# Altium PCB PCB.pcbdoc
Units mm, origin at the board's own origin, x right, y up, seen from the top; angles counter-clockwise.
Board outline 127.4 x 116.9 mm, 2 copper layers (Top Layer, Bottom Layer); 58 components, 73 nets, 184 pads, 58 vias.
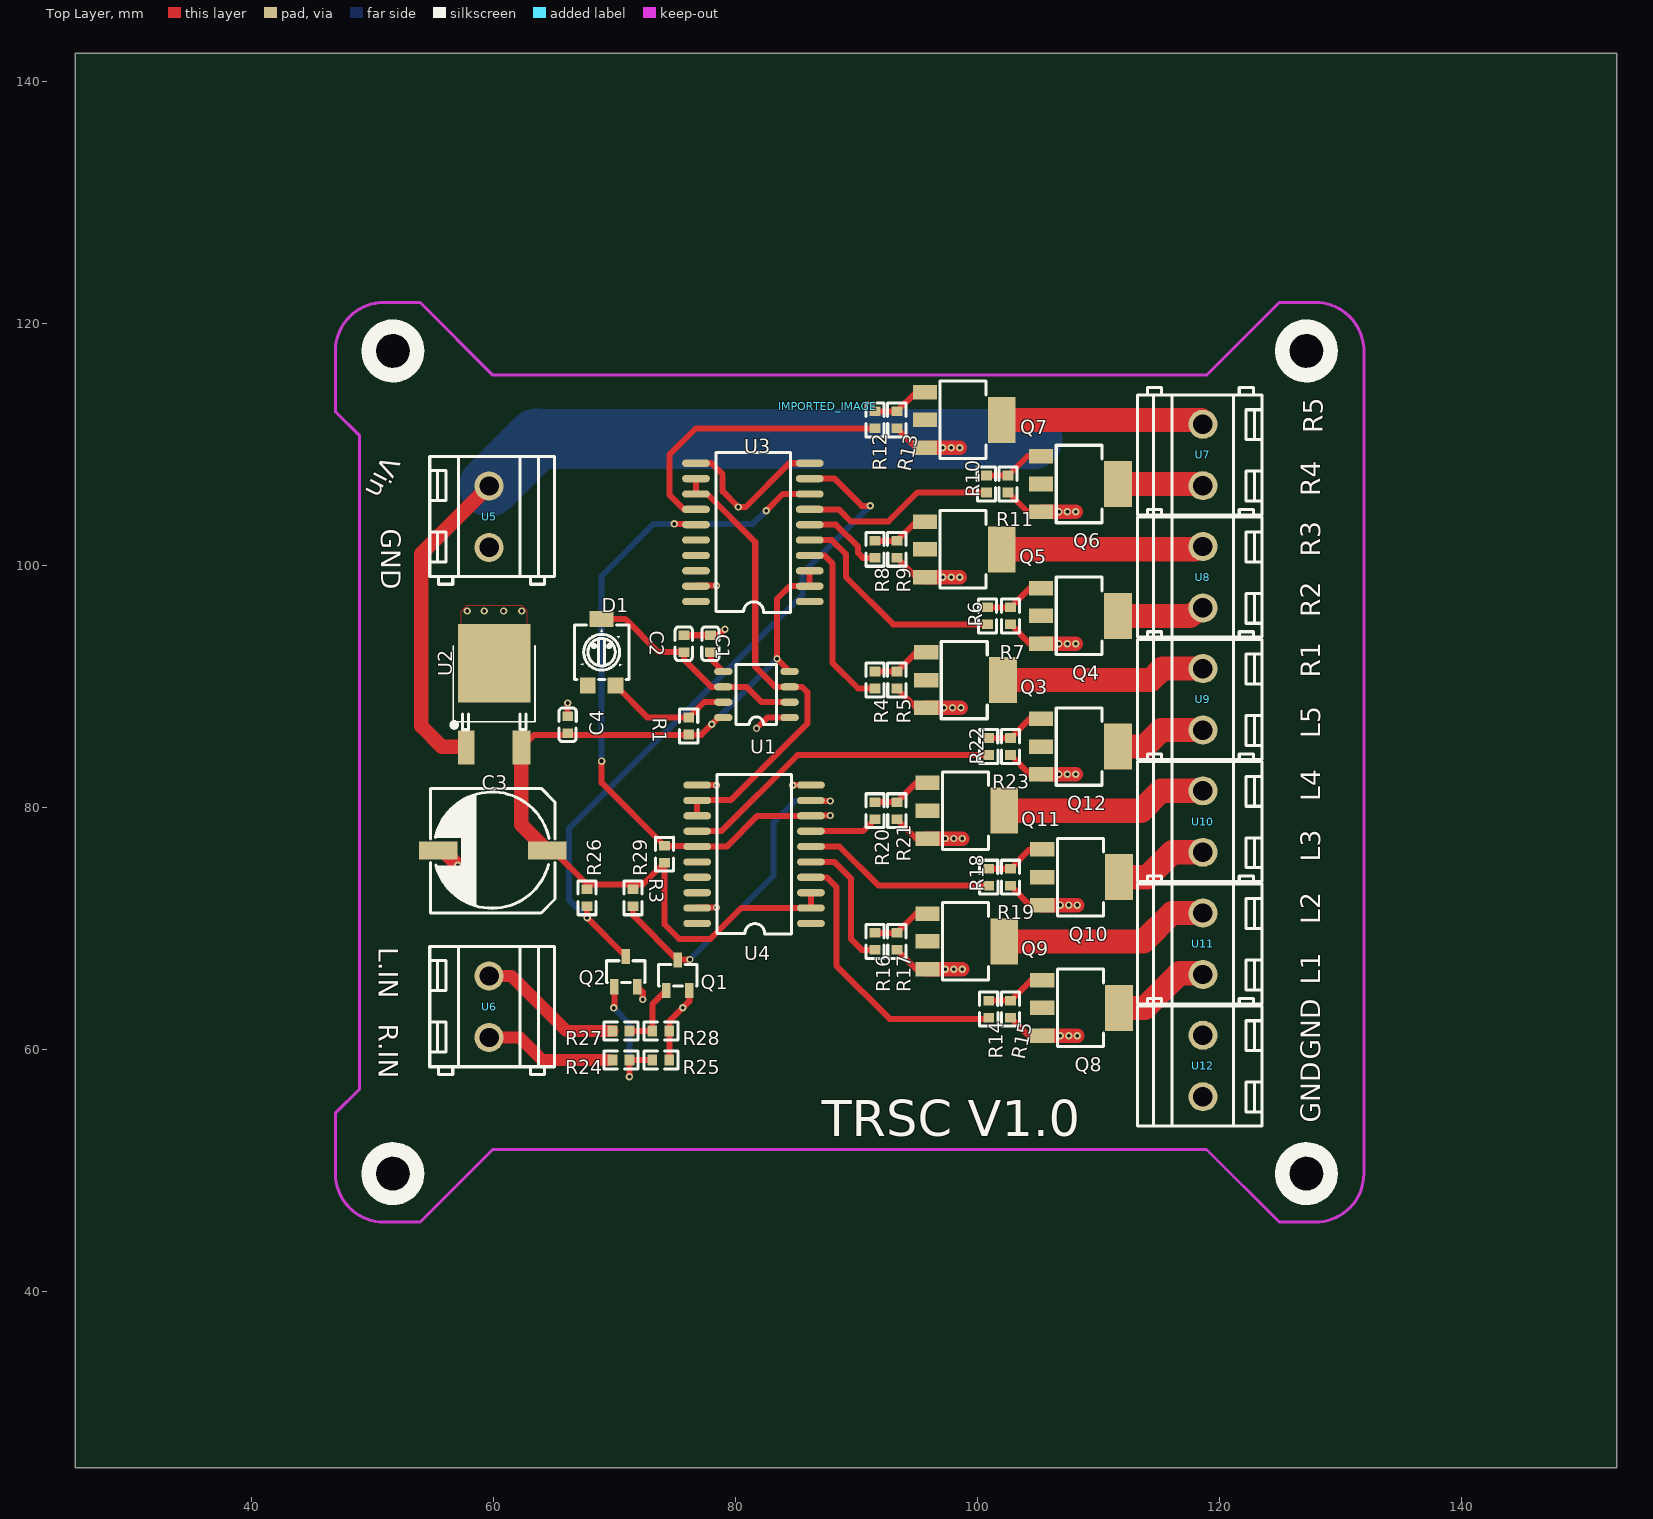
[diagram p0: Top Layer view]
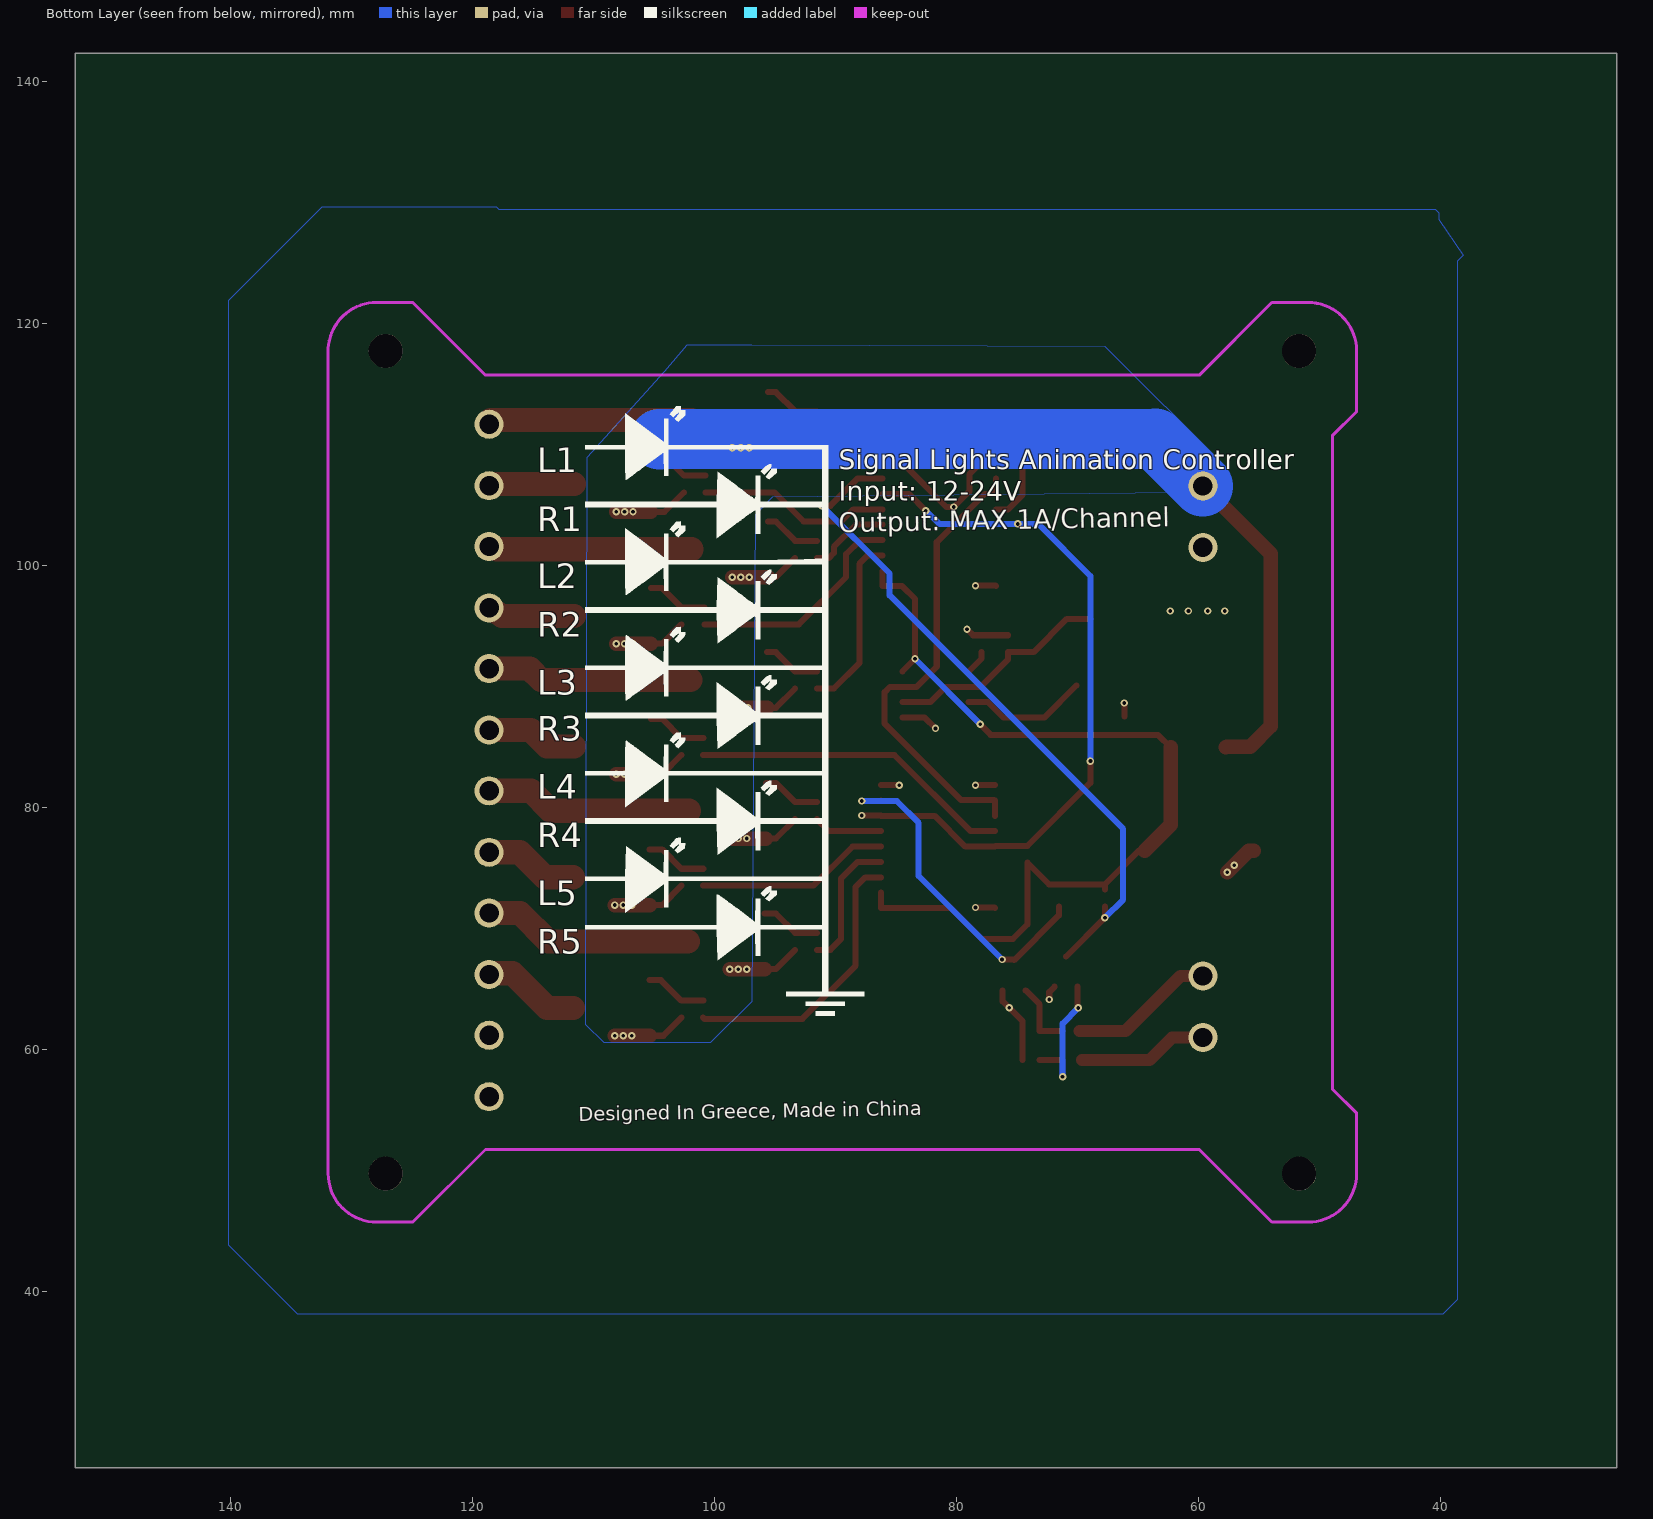
[diagram p1: Bottom Layer view, seen from below]

## Layer stack, top to bottom
Top Layer: signal copper (thickness not stored)
Dielectric: dielectric 0.32, FR-4, Dk 4.8
Bottom Layer: signal copper (thickness not stored)

## Board outline
152.8,25.4 25.4,25.4 25.4,142.3 152.8,142.3

## Components (designator, comment, footprint, x,y, rotation, side; value= is the part's Value field where it differs from the comment)
C1 "10nF" C0603 77.9,93.5 r90 top
C2 "10uF" C0603 75.7,93.5 r90 top
C3 "220uF" CAP-SMD_BD10.0-L10.3-W10.3-RD 59.9,76.4 r0 top
C4 "10uF" C0603 66.1,86.8 r90 top
D1 "3314G-1-103E" RES-ADJ-SMD_3314G-1-103E 68.9,92.8 r0 top
IMPORTED_IMAGE "IMPORTED_IMAGE" IMPORTED_IMAGE 87.603,113.133 r0 top
Q1 "BS870-7-F" SOT-23-3_L3.0-W1.7-P0.95-LS2.9-BR 75.2,66.1 r270 top
Q2 "BS870-7-F" SOT-23-3_L3.0-W1.7-P0.95-LS2.9-BR 70.9,66.4 r270 top
Q3 "ZXMP6A17GTA" SOT-223-4_L6.5-W3.5-P2.30-LS7.0-BR 98.9,90.5 r180 top
Q4 "ZXMP6A17GTA" SOT-223-4_L6.5-W3.5-P2.30-LS7.0-BR 108.4,95.801 r180 top
Q5 "ZXMP6A17GTA" SOT-223-4_L6.5-W3.5-P2.30-LS7.0-BR 98.801,101.3 r180 top
Q6 "ZXMP6A17GTA" SOT-223-4_L6.5-W3.5-P2.30-LS7.0-BR 108.4,106.7 r180 top
Q7 "ZXMP6A17GTA" SOT-223-4_L6.5-W3.5-P2.30-LS7.0-BR 98.801,112.001 r180 top
Q8 "ZXMP6A17GTA" SOT-223-4_L6.5-W3.5-P2.30-LS7.0-BR 108.501,63.401 r180 top
Q9 "ZXMP6A17GTA" SOT-223-4_L6.5-W3.5-P2.30-LS7.0-BR 98.999,68.9 r180 top
Q10 "ZXMP6A17GTA" SOT-223-4_L6.5-W3.5-P2.30-LS7.0-BR 108.501,74.201 r180 top
Q11 "ZXMP6A17GTA" SOT-223-4_L6.5-W3.5-P2.30-LS7.0-BR 98.999,79.7 r180 top
Q12 "ZXMP6A17GTA" SOT-223-4_L6.5-W3.5-P2.30-LS7.0-BR 108.4,85.001 r180 top
R1 "1K" R0603 76.1,86.7 r270 top
R3 "10K" R0603 74.099,76.101 r90 top
R4 "10K" R0603 91.501,90.5 r90 top
R5 "10K" R0603 93.299,90.5 r90 top
R6 "10K" R0603 100.8,95.801 r90 top
R7 "10K" R0603 102.7,95.801 r90 top
R8 "10K" R0603 91.501,101.3 r90 top
R9 "10K" R0603 93.299,101.3 r90 top
R10 "10K" R0603 100.701,106.7 r90 top
R11 "10K" R0603 102.499,106.7 r90 top
R12 "10K" R0603 91.501,112.001 r90 top
R13 "10K" R0603 93.299,112.001 r90 top
R14 "10K" R0603 100.899,63.299 r90 top
R15 "10K" R0603 102.7,63.299 r90 top
R16 "10K" R0603 91.501,68.9 r90 top
R17 "10K" R0603 93.299,68.9 r90 top
R18 "10K" R0603 100.899,74.201 r90 top
R19 "10K" R0603 102.7,74.201 r90 top
R20 "10K" R0603 91.501,79.7 r90 top
R21 "10K" R0603 93.299,79.7 r90 top
R22 "10K" R0603 100.899,85.001 r90 top
R23 "10K" R0603 102.7,85.001 r90 top
R24 "10K" R0603 70.5,59.1 r180 top
R25 "10K" R0603 73.8,59.1 r180 top
R26 "10K" R0603 67.7,72.5 r90 top
R27 "10K" R0603 70.5,61.5 r180 top
R28 "10K" R0603 73.8,61.5 r180 top
R29 "10K" R0603 71.5,72.5 r90 top
U1 "NE555D" SOIC-8_L5.0-W4.0-P1.27-LS6.0-BL 81.7,89.3 r90 top
U2 "L78M05ABDT-TR" TO-252-2_L6.5-W6.1-P4.58-LS10.0-TL 60,88.4 r90 top
U3 "TPIC6B595DWR" SOIC-20_L13.0-W7.6-P1.27-LS10.6-BL 81.4,102.7 r90 top
U4 "TPIC6B595DWR" SOIC-20_L13.0-W7.6-P1.27-LS10.6-BL 81.5,76.1 r90 top
U5 "DB128V-5.0-2P-OG" CONN-TH_DB128V-5.0-2P-XX 59.6,104 r90 top
U6 "DB128V-5.0-2P-OG" CONN-TH_DB128V-5.0-2P-XX 59.6,63.5 r90 top
U7 "DB128V-5.0-2P-OG" CONN-TH_DB128V-5.0-2P-XX 118.6,109.1 r270 top
U8 "DB128V-5.0-2P-OG" CONN-TH_DB128V-5.0-2P-XX 118.6,99 r270 top
U9 "DB128V-5.0-2P-OG" CONN-TH_DB128V-5.0-2P-XX 118.6,88.9 r270 top
U10 "DB128V-5.0-2P-OG" CONN-TH_DB128V-5.0-2P-XX 118.6,78.8 r270 top
U11 "DB128V-5.0-2P-OG" CONN-TH_DB128V-5.0-2P-XX 118.6,68.7 r270 top
U12 "DB128V-5.0-2P-OG" CONN-TH_DB128V-5.0-2P-XX 118.6,58.6 r270 top

## Footprints (in the part's own frame and the unit in brackets; to place one, negate y for a bottom-side part, rotate by r counter-clockwise, add the part's x,y. Pads: shape width x height; smd on the part's side, far side on the other; paste and mask are expansions set on the pad)
C0603 [mm]
  rect 0.8x0.9 smd: 1(-0.7,0) 2(0.7,0)
  silkscreen extent -1.4,-0.7 1.4,0.72
CAP-SMD_BD10.0-L10.3-W10.3-RD [mm]
  rect 3.2x1.5 smd: 1(4.5,0) 2(-4.5,0)
  silkscreen extent -5.15,-5.15 5.15,5.15
CONN-TH_DB128V-5.0-2P-XX [mm]
  round 2.4 hole 1.6: 1(-2.54,0) 2(2.54,0)
  silkscreen extent -5.59,-5.4 4.96,4.9
IMPORTED_IMAGE [mm]
R0603 [mm]
  rect 0.8x0.9 smd: 1(-0.7,0) 2(0.7,0)
  silkscreen extent -1.4,-0.75 1.4,0.76
RES-ADJ-SMD_3314G-1-103E [mm]
  rect 1.3x1.3 smd: 1(1.15,-2.75) 3(-1.15,-2.75)
  rect 2x1.3 smd: 2(0,2.75)
  silkscreen extent -2.25,-2.25 2.25,2.25
SOIC-8_L5.0-W4.0-P1.27-LS6.0-BL [mm]
  oval 0.6x1.52 smd: 1(-1.905,-2.74) 2(-0.635,-2.74) 3(0.635,-2.74) 4(1.905,-2.74) 5(1.905,2.74) 6(0.635,2.74) 7(-0.635,2.74) 8(-1.905,2.74)
  silkscreen extent -2.49,-1.67 2.5,1.7
SOIC-20_L13.0-W7.6-P1.27-LS10.6-BL [mm]
  oval 0.6x2.3 smd: 1(-5.715,-4.7) 2(-4.445,-4.7) 3(-3.175,-4.7) 4(-1.905,-4.7) 5(-0.635,-4.7) 6(0.635,-4.7) 7(1.905,-4.7) 8(3.175,-4.7) 9(4.445,-4.7) 10(5.715,-4.7) 11(5.715,4.7) 12(4.445,4.7) 13(3.175,4.7) 14(1.905,4.7) 15(0.635,4.7) 16(-0.635,4.7) 17(-1.905,4.7) 18(-3.175,4.7) 19(-4.445,4.7) 20(-5.715,4.7)
  silkscreen extent -6.6,-3.1 6.6,3.05
SOT-23-3_L3.0-W1.7-P0.95-LS2.9-BR [mm]
  rect 1.25x0.7 smd: 1(1.25,-0.95) 2(1.25,0.95) 3(-1.25,0)
  silkscreen extent -0.9,-1.6 0.9,1.6
SOT-223-4_L6.5-W3.5-P2.30-LS7.0-BR [mm]
  rect 2x1.2 smd: 1(3.175,-2.3) 2(3.175,0) 3(3.175,2.3)
  rect 2.3x3.8 smd: 4(-3.175,0)
  silkscreen extent -1.87,-3.2 1.93,3.2
TO-252-2_L6.5-W6.1-P4.58-LS10.0-TL [mm]
  rect 2.8x1.35 smd: 1(-3.475,2.275)
  rect 2.8x1.5 smd: 3(-3.475,-2.275)
  rect 6.5x6 smd: 4(3.475,-0.017)
  silkscreen extent -2.01,-3.39 4.9,3.48

## Free pads (board coordinates)
  round 2.8 hole 2.8 unplated: ""(51.65,49.7) ""(51.65,117.7) ""(127.15,49.7) ""(127.15,117.7)

## Via types
v1: diameter 0.61, hole 0.305, Top Layer to Bottom Layer, tented both sides, 58 vias

## Nets (pads, with @x,y where several pads share a name; then routed paths per layer and width w, separated by ;. In a path a pad name is that pad's centre, name@x,y a point inside that pad or via, vN(x,y) a via of type N, cw(c..) or ccw(c..) an arc to the next point about the centre after c; other vN are vias at no path point)
+24V: Q3.3 Q4.3 Q5.3 Q6.3 Q7.3 Q8.3 Q9.3 Q10.3 Q11.3 Q12.3 R5.1 R7.1 R9.1 R11.1 R13.1 R15.1 R17.1 R19.1 R21.1 R23.1 U2.1 U5.2 | length 133.7
  Top Layer w0.5: R17.1 94.9,66.6 Q9.3 ; R21.1 94.9,77.4 Q11.3@95.725,77.4 ; R5.1 94.9,88.2 Q3.3@95.625,88.2 ; R9.1 94.9,99 Q5.3@95.525,99 ; R13.1 94.9,109.7 Q7.3@95.525,109.7 ; R11.1 104.1,104.4 Q6.3 ; R15.1@102.7,62.6 104.2,61.1 Q8.3 ; R19.1 104.3,71.9 Q10.3 ; R23.1 104.3,82.7 Q12.3 ; R7.1 104.3,93.5 Q4.3
  Top Layer w1.2: U2.1 57.649,85.001 55.699,85.001 54,86.7 54,100.94 U5.2 ; Q5.3@95.526,98.999 95.527,99 v1(97.1,99) v1(97.8,99) v1(98.5,99) ; Q7.3@95.526,109.7 v1(97.1,109.7) v1(97.8,109.7) v1(98.5,109.7) ; Q3.3@95.625,88.199 95.626,88.2 v1(97.2,88.2) v1(97.9,88.2) v1(98.6,88.2) ; Q11.3@95.724,77.399 95.725,77.4 v1(97.3,77.4) v1(98,77.4) v1(98.7,77.4) ; Q9.3@95.826,66.599 95.827,66.6 v1(97.3,66.6) v1(98,66.6) v1(98.7,66.6) ; Q4.3 v1(106.7,93.5) v1(107.4,93.5) v1(108.1,93.5) ; Q6.3 Q6.3 v1(106.7,104.4) v1(107.4,104.4) v1(108.1,104.4) ; Q12.3 v1(106.7,82.7) v1(107.4,82.7) v1(108.1,82.7) ; Q8.3 v1(106.8,61.1) v1(107.5,61.1) v1(108.2,61.1) ; Q10.3 v1(106.8,71.9) v1(107.5,71.9) v1(108.2,71.9)
  Bottom Layer w5: U5.2@59.6,106.5 63.56,110.459 104.5,110.4
D1_3: D1.3
GND: C1.2 C2.2 C3.2 C4.2 Q1.2 Q2.2 R25.1 R28.1 U1.1 U2.4 U3.10 U3.11 U3.19 U4.10 U4.11 U4.19 U5.1 U12.1 U12.2 | length 38.1
  Top Layer w0.5: C4.2 v1(66.1,88.6) ; Q2.2 72.3,64.7 v1(72.3,64.1) ; R25.1 R28.1 ; R28.1 74.5,62.301 v1(75.606,63.406) 76.151,63.95 Q1.2@76.151,64.851 ; C2.2 C1.2 78.6,94.2 v1@79.1,94.7 ; U3.11 77.985,108.415 78.899,107.5 78.899,106.101 v1(80.2,104.8) 80.799,104.8 84.416,108.415 U3.10 ; U3.19 76.745,98.3 v1(78.4,98.3) ; U4.19 76.845,71.7 v1(78.4,71.7) ; U4.11@76.801,81.816 v1(78.399,81.801) ; v1(81.7,86.5) 82.595,87.395 U1.1 ; v1(84.701,81.801) U4.10
  Top Layer w1.2: C3.2 55.799,76.4 v1(57.017,75.183) v1(57.599,74.6)
  other v1: 79.1,94.7 57.8,96.2 59.2,96.2 60.8,96.2 62.3,96.2
L1: Q3.4 U9.1 | length 17
  Top Layer w2: Q3.4@101.975,90.5 114.299,90.5 115.239,91.44 U9.1
L2: Q4.4 U8.2 | length 7.2
  Top Layer w2: Q4.4 117.54,95.801 U8.2
L3: Q5.4 U8.1 | length 16.8
  Top Layer w2: Q5.4@101.876,101.3 117.959,101.3 U8.1
L4: Q6.4 U7.2 | length 7.1
  Top Layer w2: Q6.4 118.239,106.7 U7.2
L5: Q7.4 U7.1 | length 17
  Top Layer w2: Q7.4@101.875,112 118.459,112 U7.1
L_IN: R27.2 U6.2 | length 12.1
  Top Layer w1: U6.2 61.46,66.04 66,61.5 R27.2
Q1_1: Q1.1 R27.1 R28.2 | length 5.7
  Top Layer w0.5: R27.1@71.2,61.5 R28.2 73.1,63.7 Q1.1
Q1_3: Q1.3 R29.1 U4.9 | length 28.2
  Top Layer w0.5: R29.1 71.5,71.05 Q1.3 75.25,67.4 v1(76.2,67.4) ; U4.9 86.245,80.5 v1(87.8,80.5)
  Bottom Layer w0.5: v1(76.2,67.4) 83.1,74.3 83.1,78.7 84.9,80.5 v1(87.8,80.5)
Q2_1: Q2.1 R24.1 R25.2 | length 11.3
  Top Layer w0.5: v1(69.9,63.4) 69.95,63.45 Q2.1 ; v1@71.2,57.7 R24.1 R25.2@73.1,59.1
  Bottom Layer w0.5: v1(69.9,63.4) 71.2,62.1 v1@71.2,57.7
  other v1: 71.2,57.7
Q3_2: Q3.2
Q4_2: Q4.2
Q5_2: Q5.2
Q6_2: Q6.2
Q7_2: Q7.2
Q8_2: Q8.2
Q9_2: Q9.2
Q10_2: Q10.2
Q11_2: Q11.2
Q12_2: Q12.2
R1: Q8.4 U11.2 | length 8.1
  Top Layer w2: Q8.4 113.799,63.401 116.661,66.261 U11.2@118.6,66.261
R2: Q9.4 U11.1 | length 17.4
  Top Layer w2: Q9.4@102.176,68.9 113.7,68.9 116.039,71.239 U11.1
R3: Q10.4 U10.2 | length 7.8
  Top Layer w2: Q10.4 114.002,74.201 116.06,76.261 U10.2
R4: Q11.4 U10.1 | length 17.2
  Top Layer w2: Q11.4@102.074,79.7 113.499,79.7 115.14,81.341 U10.1
R5: Q12.4 U9.2 | length 7.6
  Top Layer w2: Q12.4 113.801,85.001 115.16,86.36 U9.2
R5_2: Q3.1 R4.2 R5.2 | length 4.8
  Top Layer w0.5: R4.2 R5.2 94.9,92.8 Q3.1@95.625,92.8
R6_2: Q4.1 R6.2 R7.2 | length 5.1
  Top Layer w0.5: R6.2@100.799,96.5 R7.2@102.699,96.5 ; R7.2@102.7,96.5 104.3,98.1 Q4.1
R8_2: Q5.1 R8.2 R9.2 | length 4.7
  Top Layer w0.5: R8.2 R9.2 94.9,103.6 Q5.1@95.525,103.6
R10_2: Q6.1 R10.2 R11.2 | length 5.2
  Top Layer w0.5: R10.2@100.7,107.4 R11.2 104.1,109 Q6.1
R12_2: Q7.1 R12.2 R13.2 | length 4.7
  Top Layer w0.5: R12.2@91.5,112.7 93.3,112.7 94.9,114.3 Q7.1@95.525,114.3
R15_2: Q8.1 R14.2 R15.2 | length 5.1
  Top Layer w0.5: R14.2 R15.2 104.4,65.7 Q8.1
R17_2: Q9.1 R16.2 R17.2 | length 5
  Top Layer w0.5: R16.2 R17.2 94.9,71.2 Q9.1@95.825,71.2
R19_2: Q10.1 R18.2 R19.2 | length 5.1
  Top Layer w0.5: R18.2@100.9,74.9 102.7,74.9 104.3,76.5 Q10.1
R21_2: Q11.1 R20.2 R21.2 | length 4.9
  Top Layer w0.5: R20.2 R21.2 ; R21.2@93.3,80.4 94.9,82 Q11.1@95.725,82
R23_2: Q12.1 R22.2 R23.2 | length 5
  Top Layer w0.5: R22.2@100.9,85.7 102.7,85.7 104.3,87.3 Q12.1
R_IN: R24.2 U6.1 | length 10.8
  Top Layer w1: U6.1 62.14,60.96 64,59.1 R24.2@69.6,59.1
S$68: 
S$4242: 
S$4326: 
S$4330: 
S$4333: 
S$4335: 
S$4455: 
S$4457: 
U1_2: C2.1 D1.2 U1.2 U1.6 | length 18.7
  Top Layer w0.5: D1.2 70.85,95.55 73.6,92.8 C2.1 ; C2.1 75.699,92.199 77.965,89.936 78.96,89.936 80.865,89.936 82.135,88.666 U1.2@84.439,88.666
U1_3: U1.3 U3.12 U3.13 U4.12 U4.13 | length 38.9
  Top Layer w0.5: U3.13 77.624,105.875 81.599,101.9 81.599,91.6 83.266,89.936 U1.3@84.439,89.936 ; U3.13 76.7,106.675 U3.12 ; U4.13 U4.12 76.855,80.6 79.6,80.6 85.9,86.9 85.9,89.5 85.465,89.935 U1.3
U1_5: C1.1 U1.5 | length 2
  Top Layer w0.5: C1.1 77.9,92.265 U1.5
U1_7: D1.1 R1.1 U1.7 | length 10.5
  Top Layer w0.5: D1.1 72.699,87.399 R1.1@76.1,87.401 ; R1.1 77.365,88.665 U1.7
U3_1: U3.1
U3_4: R4.1 U3.4 | length 14.8
  Top Layer w0.5: U3.4 87.304,100.795 88,100.099 88,91.9 90.101,89.799 R4.1
U3_5: R6.1 U3.5 | length 18.7
  Top Layer w0.5: U3.5 87.934,102.065 89.1,100.899 89.1,98.999 92.999,95.1 R6.1
U3_6: R8.1 U3.6 | length 6.8
  Top Layer w0.5: U3.6 88.264,103.335 90.101,101.501 90.101,100.998 90.499,100.599 R8.1
U3_7: R10.1 U3.7 | length 16
  Top Layer w0.5: U3.7 88.495,104.605 89.501,103.599 92.6,103.599 95,105.999 R10.1
U3_8: R3.2 U3.8 U3.15 U4.8 U4.15 | length 61.1
  Top Layer w0.5: v1(68.9,83.8) 68.9,82 74.1,76.8 76.735,76.8 U4.15 ; v1(74.9,103.4) 76.635,103.4 U3.15 ; U4.15@76.801,76.736 79.235,76.736 81.775,79.276 U4.8 ; v1(82.5,104.5) 83.875,105.875 U3.8 ; U4.8 86.225,79.3 v1(87.8,79.3)
  Bottom Layer w0.5: v1(68.9,83.8) 68.9,99.1 73.2,103.4 v1(74.9,103.4) 81.4,103.4 v1(82.5,104.5)
U3_9: Q2.3 R26.1 U3.9 | length 56.4
  Top Layer w0.5: R26.1 v1(67.7,70.85) Q2.3 ; U3.9 88.155,107.145 90.4,104.9 v1(91.1,104.9)
  Bottom Layer w0.5: v1(67.7,70.85) 66.199,72.349 66.199,78.199 85.501,97.501 85.501,99.301 v1(91.1,104.9)
U3_14: R12.1 U3.14 | length 23.9
  Top Layer w0.5: U3.14 75.696,104.605 74.5,105.801 74.5,109.101 76.7,111.3 R12.1
U3_16: U3.16
U3_17: U3.17
U3_18: U3.18
U3_20: U3.20
U4_1: U4.1
U4_4: R14.1 U4.4 | length 23.4
  Top Layer w0.5: U4.4 87.505,74.196 88.3,73.401 88.3,66.901 92.699,62.499 100.799,62.499 R14.1@100.901,62.601
U4_5: R16.1 U4.5 | length 11.2
  Top Layer w0.5: U4.5 88.135,75.465 89.5,74.1 89.5,69.1 90.4,68.2 R16.1
U4_6: R18.1 U4.6 | length 16
  Top Layer w0.5: U4.6 88.565,76.735 91.8,73.5 R18.1
U4_7: R20.1 U4.7 | length 5.7
  Top Layer w0.5: U4.7 90.505,78.005 R20.1
U4_14: R22.1 U4.14 | length 26.7
  Top Layer w0.5: U4.14@76.801,78.006 78.805,78.006 85.099,84.3 R22.1@100.901,84.3
U4_16: U4.16
U4_17: U4.17
U4_18: U4.18
U4_20: U4.20
VCC: C3.1 C4.1 R1.2 R3.1 R26.2 R29.2 U1.4 U1.8 U2.3 U3.2 U3.3 U4.2 U4.3 | length 77.2
  Top Layer w0.5: U2.3 63.323,85.973 76.27,85.973 77.138,85.973 v1(78.004,86.839) U1.8@78.56,87.395 ; C3.1 64.9,76.4 R26.2@67.7,73.6 ; R26.2 R26.2@67.7,73.6 ; 69.6,73.599 72.3,73.599 74.101,75.4 74.1,70.3 75.3,69.1 77.9,69.1 80.455,71.655 U4.2 U4.3 ; 69.6,73.6 R26.2@67.7,73.6 ; U1.4 v1(83.4,92.245) 83.4,97.201 84.454,98.255 U3.2 86.1,98.43 U3.3
  Top Layer w1.2: U2.3 62.275,78.524 C3.1@64.401,76.401
  Bottom Layer w0.5: v1@78.005,86.84 v1(83.4,92.245)

## Polygon pours and split planes (outlines as drawn)
GND on Bottom Layer (solid): 38.1,125.6 38.6,125.1 38.6,39.3 39.8,38.1 134.4,38.1 140.1,43.8 140.1,121.9 132.4,129.6 118,129.6 117.8,129.4 40.4,129.4 40.1,129.1 40.1,128.6
+24V on Bottom Layer (solid): 95.2,105.6 96.6,104.1 96.9,63.9 100.3,60.5 109.1,60.5 110.6,62 110.5,108.9 104.1,116 102.2,118.2 96.9,118.2 67.7,118.1 57.8,108.2 57.7,106
GND on Top Layer (solid): 57.3,96.2 57.8,96.7 62.3,96.7 62.7,96.3 62.7,96.2 62.7,94.9 62.1,94.3 61,94.3 60.9,94.2 58.5,94.2 57.9,94.8 57.3,94.8 57.3,96.2

## Keep-outs
Keep-Out Layer:
  lines w0.254 net S$4242: 127.9,45.7 ccw(c127.9,49.7) 131.9,49.7 ; 127.9,121.702 cw(c127.9,117.7) 131.9,117.563
  lines w0.254 net S$4333: 46.9,49.7 ccw(c50.9,49.7) 50.9,45.7
  lines w0.254 net S$4335: 46.9,117.7 cw(c50.9,117.7) 50.9,121.7

## Silkscreen, mask and mechanical layers (free items; w line width, h text height)
Top Overlay:
  circle w1.2: c127.15,117.7 r2
  circle w1.2: c127.15,49.7 r2
  circle w1.2: c51.65,49.7 r2
  circle w1.2: c51.65,117.7 r2
  text "R5" at 128.5,110.9 h1.6 r90
  text "Vin" at 50.887,109.163 h1.6 r243
  text "R4" at 128.3,105.7 h1.6 r90
  text "GND" at 50.7,103 h1.6 r270
  text "R3" at 128.3,100.7 h1.6 r90
  text "R2" at 128.3,95.7 h1.6 r90
  text "R1" at 128.3,90.7 h1.6 r90
  text "L5" at 128.3,85.7 h1.6 r90
  text "L4" at 128.3,80.5 h1.6 r90
  text "L3" at 128.3,75.5 h1.6 r90
  text "L2" at 128.3,70.3 h1.6 r90
  text "L.IN" at 50.5,68.4 h1.6 r270
  text "L1" at 128.3,65.3 h1.6 r90
  text "R.IN" at 50.5,62.1 h1.6 r270
  text "GND" at 128.3,59.1 h1.6 r90
  text "GND" at 128.3,53.9 h1.6 r90
  text "TRSC V1.0" at 87.1,52.8 h3
Bottom Overlay:
  text "Signal Lights Animation Controller" at 89.7,107.9 h1.6
  text "L1" at 114.6,107.684 h2.03
  text "Input: 12-24V" at 89.7,105.3 h1.6
  text "R1" at 114.6,102.784 h2.03
  text "Output: MAX 1A/Channel" at 89.686,102.7 h1.6 r359
  text "L2" at 114.6,98.084 h2.03
  text "R2" at 114.6,94.084 h2.03
  text "L3" at 114.6,89.284 h2.03
  text "R3" at 114.6,85.484 h2.03
  text "L4" at 114.6,80.684 h2.03
  text "R4" at 114.6,76.684 h2.03
  text "L5" at 114.6,71.884 h2.03
  text "R5" at 114.6,67.884 h2.03
  text "Designed In Greece, Made in China" at 111.2,53.6 h2 r359